# Altium PCB E16-12-VCU.PcbDoc
Units mil, origin at the board's own origin, x right, y up, seen from the top; angles counter-clockwise.
Board outline 2265 x 4510 mil, 2 copper layers (Top Layer, Bottom Layer); 54 components, 44 nets, 245 pads, 23 vias.
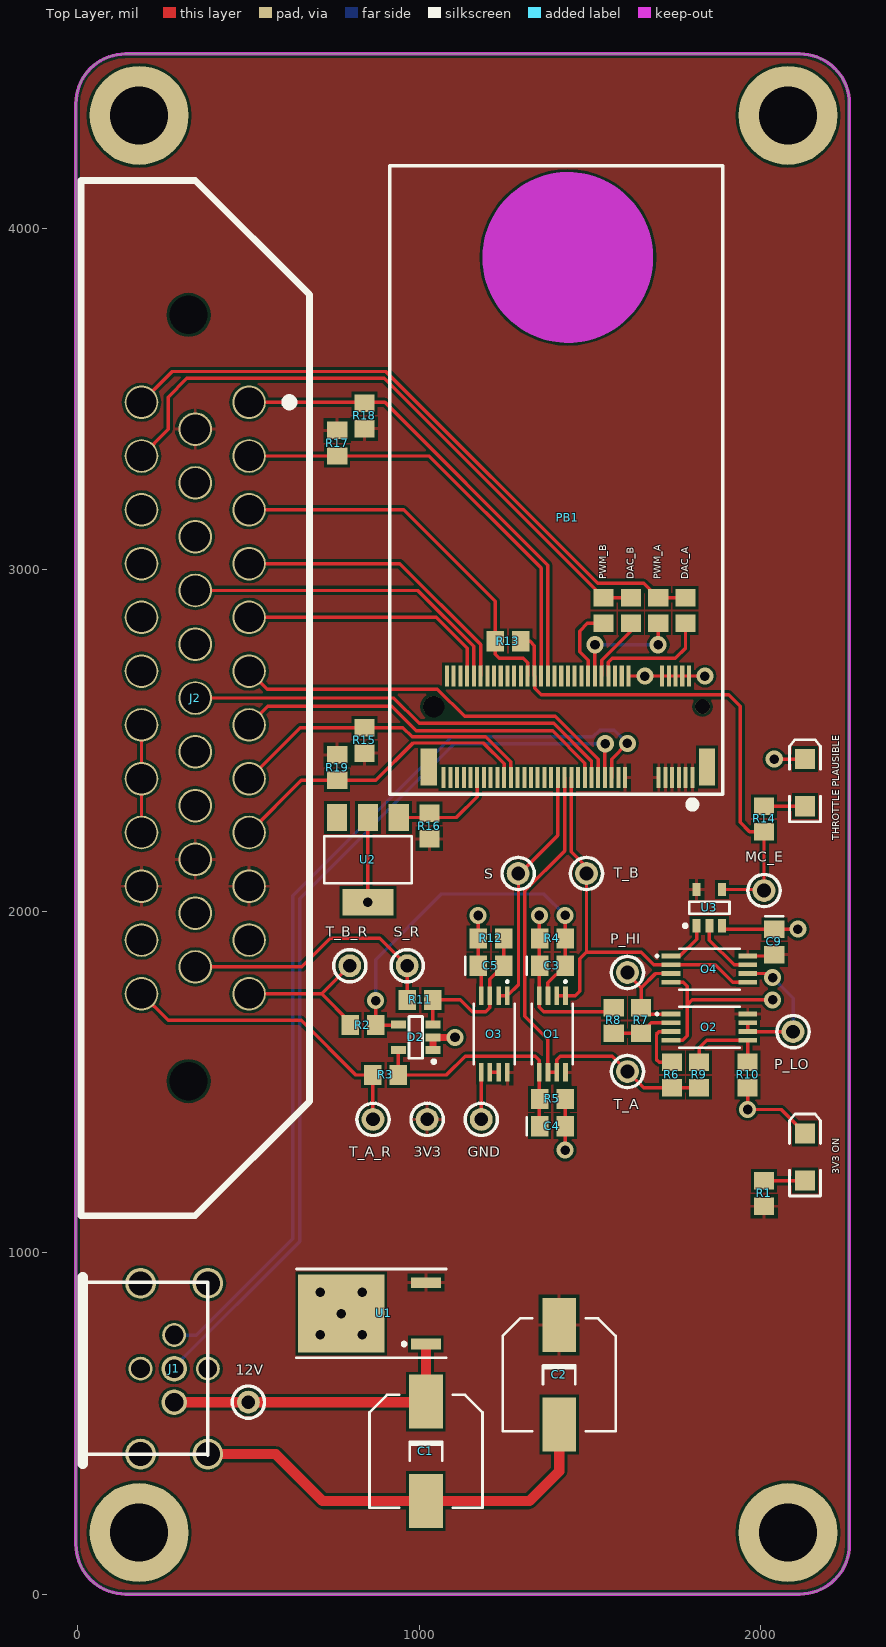
[diagram p0: Top Layer view]
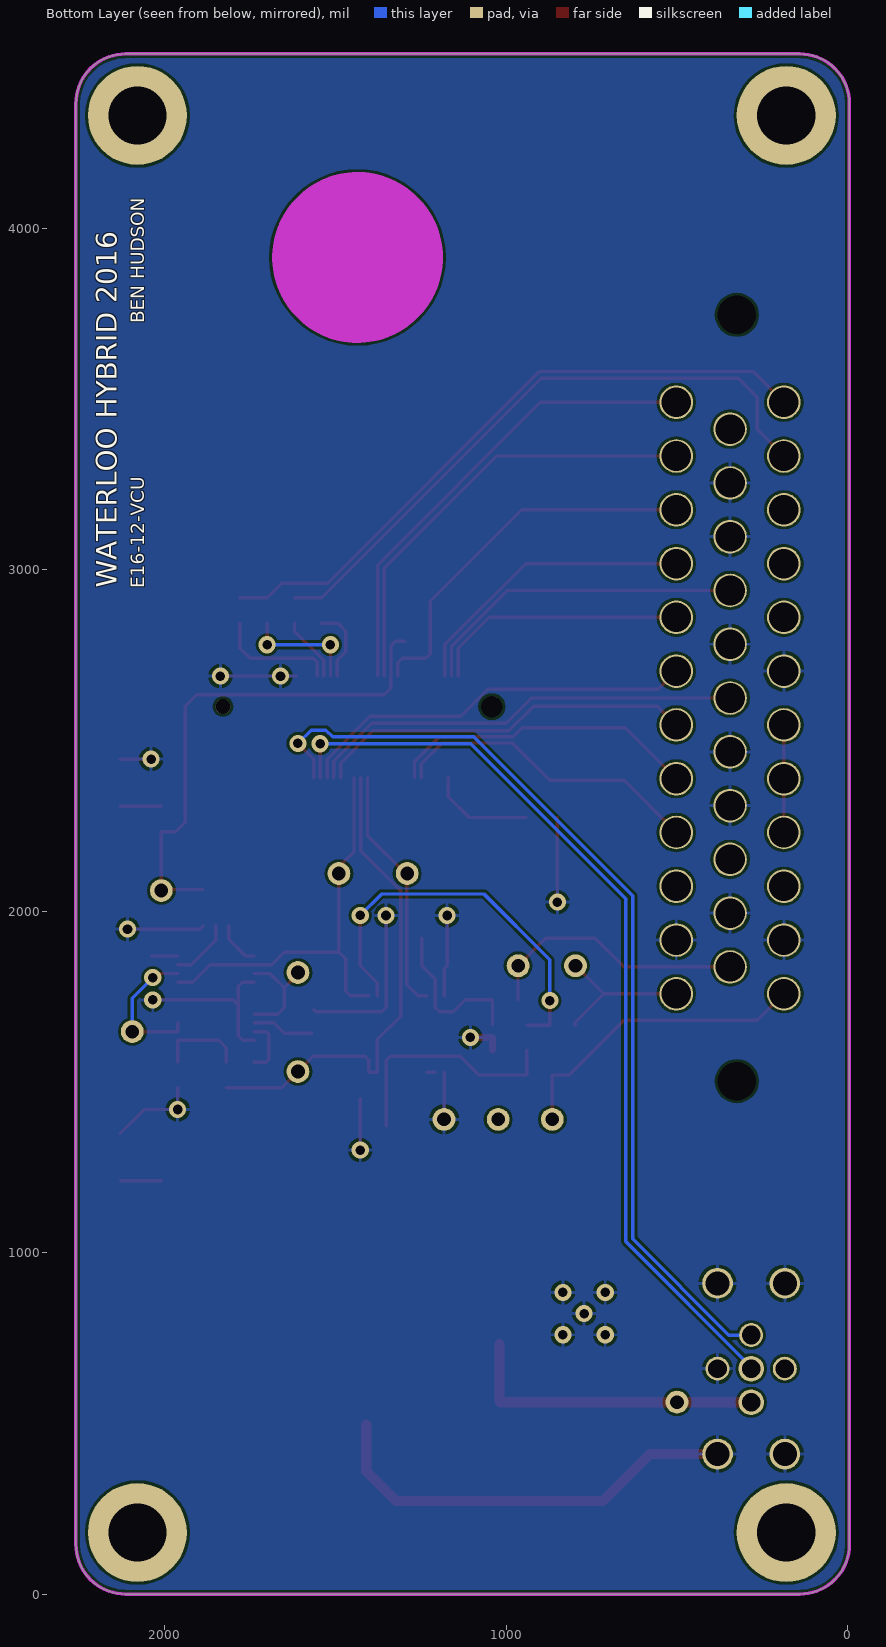
[diagram p1: Bottom Layer view, seen from below]
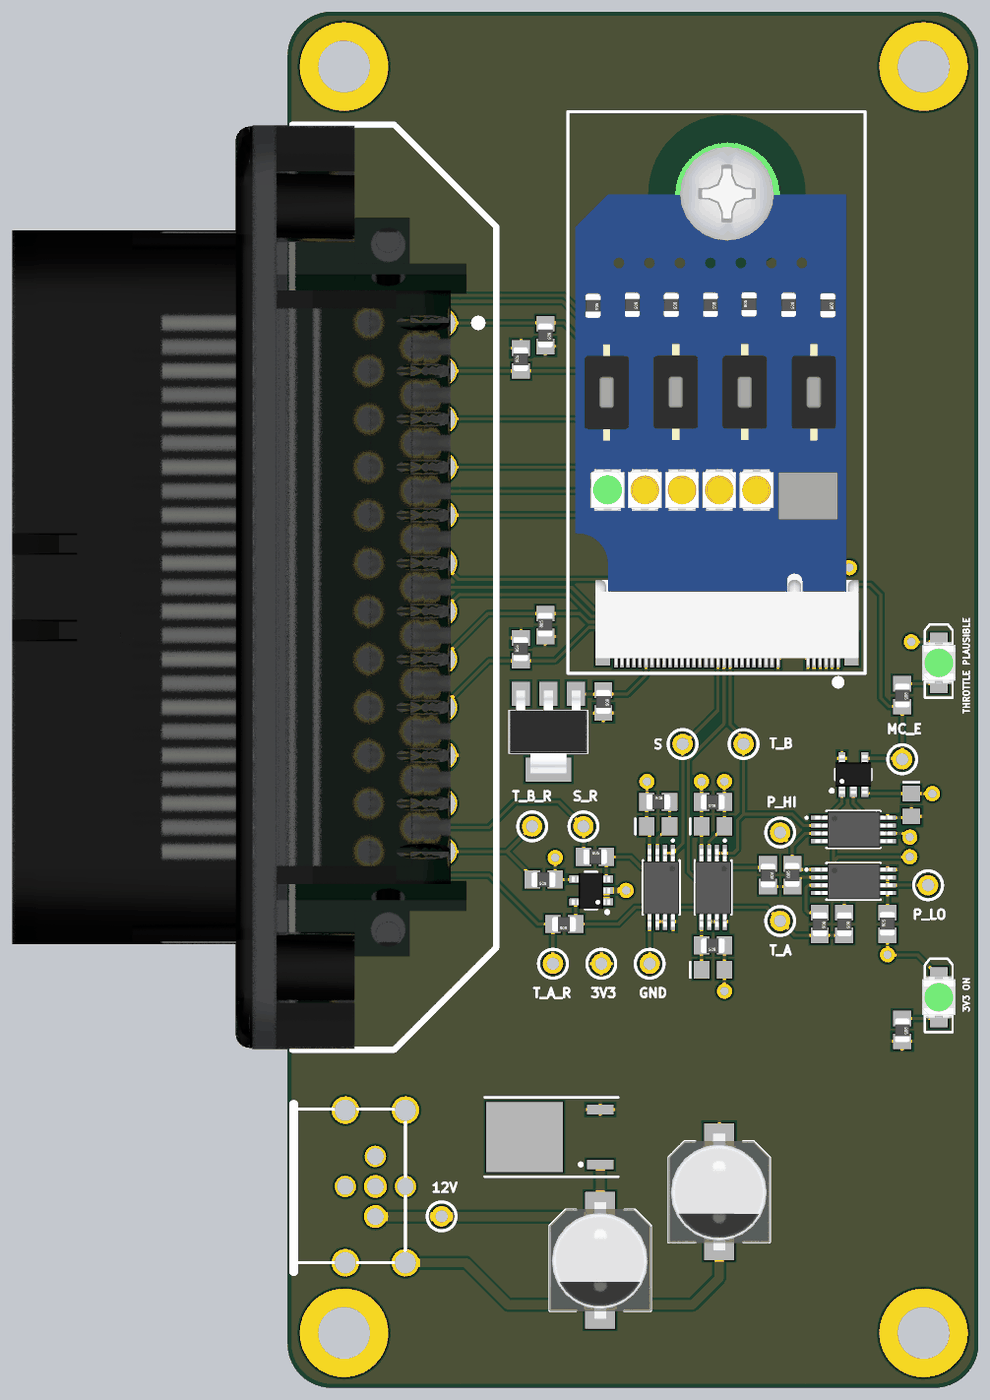
[diagram p2: 3D render of the assembled board from above, using the file's embedded part models]

## Layer stack, top to bottom
Top Solder: solder mask 0.4, Solder Resist, Dk 3.5
Top Layer: signal copper 1.4
Dielectric 1: dielectric 12.6, FR-4, Dk 4.8
Bottom Layer: signal copper 1.4
Bottom Solder: solder mask 0.4, Solder Resist, Dk 3.5

## Board outline
-5,145 -5,4365 cw(c140,4365) 140,4510 2115,4510 cw(c2115,4365) 2260,4365 2260,145 cw(c2115,145) 2115,0 140,0 cw(c140,145)

## Design rules (kind name [scope] priority, off if disabled: settings)
Clearance [All] p1: gap=7.87
DiffPairsRouting [All] p1: maxlimit=10 minlimit=10 mostfreqgap=10 toplayer_minwidth=10 toplayer_maxwidth=15 toplayer_prefwidth=15 bottomlayer_minwidth=10 bottomlayer_maxwidth=15 bottomlayer_prefwidth=15 maxuncoupledlength=500
PolygonConnect [All] p1: connectstyle=Relief reliefconductorwidth=10 reliefentries=4 polygonreliefangle="90 Angle" airgapwidth=10
RoutingVias [All] p1: holewidth=28 width=50 viastyle="Through Hole" minholewidth=28 minwidth=50 maxholewidth=28 maxwidth=50
SolderMaskExpansion [All] p1: expansion=4
Width [All] p1: maxlimit=30 minlimit=10 preferedwidth=10
29 further rules are at their usual default settings.

## Classes and differential pairs
component class E16-12-VCU-004: C9 O2 O4 R6 R7 R8 R9 R10 R14 "THROTTLE PLAUSIBLE" U3
component class E16-12-VCU-003: DAC_A DAC_B PB1 PWM_A PWM_B R13 R16 R17 R18 U2
component class E16-12-VCU-002: 3V3 "3V3 ON" 12V C1 C2 GND J1 J2 MC_E P_HI P_LO R1 R15 R19 s S_R T_A T_A_R T_B T_B_R U1
component class E16-12-VCU-001: C3 C4 C5 D2 O1 O3 R2 R3 R4 R5 R11 R12
differential pair IMU: +IMU_P -IMU_N
differential pair CAN: +CAN_P -CAN_N

## Components (designator, comment, footprint, x,y, rotation, side; value= is the part's Value field where it differs from the comment)
3V3 "Test Point" "TEST POINT 5000K" 1023.5,1390 r180 top locked (schematic designator TP2)
"3V3 ON" "OVS5MGBCR4" OVS5MGBCR4 2130,1280 r90 top locked (schematic designator D1)
12V "Test Point" "TEST POINT 5000K" 500,562 r180 top locked (schematic designator TP1)
C1 "UWT1E470MCL1GB" UWT1E470MCL1GB 1020,418 r270 top locked
C2 "UWT1E470MCL1GB" UWT1E470MCL1GB 1410,642 r270 top locked
C3 "Cap" C0805 1390,1840 r0 top
C4 "Cap" C0805 1390,1370 r0 top
C5 "Cap" C0805 1210,1840 r0 top locked
C9 "Cap" C0805 2040,1910 r270 top
D2 "RCLAMP3354S.TCT" SOT95P280X145-5N#1 990,1630 r180 top locked
DAC_A "Res" 2012[0805] 1780,2880 r270 top (schematic designator R26)
DAC_B "Res" 2012[0805] 1620,2880 r270 top (schematic designator R27)
GND "Test Point" "TEST POINT 5000K" 1182,1390 r180 top locked (schematic designator TP3)
J1 "MOLEX 84864-9003" "MOLEX 84864-9003" 282.72,660 r90 top locked
J2 "TE-1-776163-1" TE-1-776163-1 501.97,3490 r270 top locked
MC_E "Test Point" "TEST POINT 5000K" 2010,2060 r0 top (schematic designator TP13)
O1 "ADA4096-2" TSSOP8 1390,1640 r180 top locked
O2 "ADA4096-2" TSSOP8 1850,1660 r270 top locked
O3 "ADA4096-2" TSSOP8 1220,1640 r180 top locked
O4 "ADA4096-2" TSSOP8 1850,1830 r270 top locked
P_HI "Test Point" "TEST POINT 5000K" 1610,1820 r0 top locked (schematic designator TP11)
P_LO "Test Point" "TEST POINT 5000K" 2095,1647 r0 top locked (schematic designator TP12)
PB1 "ProcBoardRev2" PROC_BOARD 1800,3080 r180 top locked
PWM_A "Res" 2012[0805] 1700,2880 r90 top (schematic designator R29)
PWM_B "Res" 2012[0805] 1540,2880 r90 top (schematic designator R28)
R1 "Res" 2012[0805] 2010,1173 r270 top
R2 "Res" 2012[0805] 835,1666 r180 top locked
R3 "Res" 2012[0805] 902,1520 r180 top locked
R4 "Res" 2012[0805] 1390,1920 r180 top
R5 "Res" 2012[0805] 1390,1450 r180 top
R6 "Res" 2012[0805] 1740,1520 r270 top locked
R7 "Res" 2012[0805] 1650,1680 r90 top locked
R8 "Res" 2012[0805] 1570,1680 r270 top locked
R9 "Res" 2012[0805] 1820,1520 r270 top
R10 "Res" 2012[0805] 1962,1520 r90 top locked
R11 "Res" 2012[0805] 1003,1740 r0 top locked
R12 "Res" 2012[0805] 1210,1920 r0 top locked
R13 "Res" 2012[0805] 1260,2790 r180 top
R14 "Res" 2012[0805] 2010,2270 r270 top
R15 "Res" 2012[0805] 840,2500 r90 top
R16 "Res" 2012[0805] 1030,2249 r270 top
R17 "Res" 2012[0805] 760,3370 r90 top
R18 "Res" 2012[0805] 840,3450 r270 top
R19 "Res" 2012[0805] 760,2420 r90 top
S "Test Point" "TEST POINT 5000K" 1290,2110 r270 top locked (schematic designator TP4)
S_R "Test Point" "TEST POINT 5000K" 965,1840 r0 top locked (schematic designator TP7)
T_A "Test Point" "TEST POINT 5000K" 1610,1530 r270 top locked (schematic designator TP6)
T_A_R "Test Point" "TEST POINT 5000K" 865,1390 r0 top locked (schematic designator TP8)
T_B "Test Point" "TEST POINT 5000K" 1490,2110 r270 top locked (schematic designator TP5)
T_B_R "Test Point" "TEST POINT 5000K" 797,1840 r0 top locked (schematic designator TP9)
"THROTTLE PLAUSIBLE" "OVS5MGBCR4" OVS5MGBCR4 2130,2376 r90 top locked (schematic designator D3)
U1 "UA78M33CKVURG3" TO-252-3 646,822 r90 top locked
U2 "DS2401" SOT-223-3L 850,2150 r180 top
U3 "NC7SZ08" SOT95P280X145-5N#2 1850,2010 r90 top locked

## Footprints (in the part's own frame and the unit in brackets; to place one, negate y for a bottom-side part, rotate by r counter-clockwise, add the part's x,y. Pads: shape width x height; smd on the part's side, far side on the other; paste and mask are expansions set on the pad)
2012[0805] [mm] "Chip Resistor; Body 2.0 x 1.3 mm (LxW typ)"
  rect 1.3x1.5 smd: 1(-0.95,0) 2(0.95,0)
  body extent -0.97,-0.61 1.03,0.64, height 0.77
C0805 [mm] "Chip Capacitor; Body 2.0 x 1.2 mm (LxW typ)"
  rect 1.3x1.5 smd: 1(-0.95,0) 2(0.95,0)
  silkscreen extent -1.9,-0.65 -1.9,0.65
"MOLEX 84864-9003" [mil]
  round 70 hole 55: 1(0,98.5) 3(0,-98.5) 4(98.5,0)
  round 75 hole 55: 2(-98.5,0) 5(0,0)
  round 90 hole 70: 6(250,98.5) 7(250,-98.5) 8(-250,98.5) 9(-250,-98.5)
  silkscreen extent -278,-99 268,268, body extent -299,-148 299,452, height 710
OVS5MGBCR4 [mm] "SMT LED; 2 Flat Leads; GREEN"
  rect 1.5x1.5 smd: 1(-1.75,0) 2(1.75,0)
  silkscreen extent -2.9,-1.15 3.2,1.15, body extent -1.75,-1.4 1.75,1.4, height 1.6
PROC_BOARD [mm]
  rect 1.2x2.75 smd: 0(-1.1,16.725) 0(19.6,16.725)
  round 1.1 hole 1.1 unplated paste+0: 0(-0.75,12.225)
  round 0 hole 6.35 unplated: 0(9.258,-21.183)
  round 1.524 hole 1.6 unplated: 0(19.25,12.225)
  rect 0.3x1.55 smd: 1(0,17.5) 2(0.25,9.95) 3(0.5,17.5) 4(0.75,9.95) 5(1,17.5) 6(1.25,9.95) 7(1.5,17.5) 8(1.75,9.95) 9(2,17.5) 10(2.25,9.95) 11(2.5,17.5) 12(4.75,9.95) 13(5,17.5) 14(5.25,9.95) 15(5.5,17.5) 16(5.75,9.95) 17(6,17.5) 18(6.25,9.95) 19(6.5,17.5) 20(6.75,9.95) 21(7,17.5) 22(7.25,9.95) 23(7.5,17.5) 24(7.75,9.95) 25(8,17.5) 26(8.25,9.95) 27(8.5,17.5) 28(8.75,9.95) 29(9,17.5) 30(9.25,9.95) 31(9.5,17.5) 32(9.75,9.95) 33(10,17.5) 34(10.25,9.95) 35(10.5,17.5) 36(10.75,9.95) 37(11,17.5) 38(11.25,9.95) 39(11.5,17.5) 40(11.75,9.95) 41(12,17.5) 42(12.25,9.95) 43(12.5,17.5) 44(12.75,9.95) 45(13,17.5) 46(13.25,9.95) 47(13.5,17.5) 48(13.75,9.95) 49(14,17.5) 50(14.25,9.95) 51(14.5,17.5) 52(14.75,9.95) 53(15,17.5) 54(15.25,9.95) 55(15.5,17.5) 56(15.75,9.95) 57(16,17.5) 58(16.25,9.95) 59(16.5,17.5) 60(16.75,9.95) 61(17,17.5) 62(17.25,9.95) 63(17.5,17.5) 64(17.75,9.95) 65(18,17.5) 66(18.25,9.95) 67(18.5,17.5)
  Keep-Out Layer circle w6.35: c9.258,-21.183 r3.175
  silkscreen extent -2.25,-28 22.5,19.75, body extent -1.7,-25.44 21.89,18.08, height 6.34
SOT95P280X145-5N#1 [mm] "SOT23, 5-Leads, Body 2.95x2.80mm, Pitch 0.95mm, IPC Medium Density"
  rect 1.1x0.6 smd: 1(-1.275,0.95) 2(-1.275,0) 3(-1.275,-0.95) 4(1.275,-0.95) 5(1.275,0.95)
  silkscreen extent -1.48,-1.55 0.5,1.92, body extent -1.6,-1.48 1.6,1.52, height 0.91
SOT95P280X145-5N#2 [mm] "SOT23, 5-Leads, Body 2.90x2.80mm, Pitch 0.95mm, IPC Medium Density"
  rect 1x0.6 smd: 1(-1.35,0.95) 2(-1.35,0) 3(-1.35,-0.95) 4(1.35,-0.95) 5(1.35,0.95)
  silkscreen extent -1.47,-1.5 0.45,1.92, body extent -1.6,-1.5 1.6,1.5, height 0.92
SOT-223-3L [mm] "4-lead SOT-223"
  rect 3.8x2 smd mask+0.07: 1(0,3.15)
  rect 1.5x2 smd mask+0.07: 2(-2.3,-3.15) 3(2.3,-3.15) 4(0,-3.15)
  silkscreen extent -3.25,-1.75 3.25,1.75, body extent -3.25,-3.45 3.25,3.45, height 1.6
TE-1-776163-1 [mm] "CONN HEADER 35POS R/A GOLD BLACK"
  round 0 hole 2.85 unplated: 0(-6.5,-4.5) 0(50.5,-4.5)
  round 2.5 hole 2.2: 1(0,0) 2(4,0) 3(8,0) 4(12,0) 5(16,0) 6(20,0) 7(24,0) 8(28,0) 9(32,0) 10(36,0) 11(40,0) 12(44,0) 13(2,-4) 14(6,-4) 15(10,-4) 16(14,-4) 17(18,-4) 18(22,-4) 19(26,-4) 20(30,-4) 21(34,-4) 22(38,-4) 23(42,-4) 24(0,-8) 25(4,-8) 26(8,-8) 27(12,-8) 28(16,-8) 29(20,-8) 30(24,-8) 31(28,-8) 32(32,-8) 33(36,-8) 34(40,-8) 35(44,-8)
  silkscreen extent -16.5,-12.5 60.5,4.5, body extent -16.45,-35.8 60.45,2, height 27.77
"TEST POINT 5000K" [mm] "Test Point, 5000 Keystone Series, 0.040\" Hole"
  round 1.7 hole 1.02 mask+0.1: 1(0,0)
  silkscreen extent -1.2,-1.2 1.2,1.2
TO-252-3 [mm] "D-PAK/TO-252-3; 3 Leads"
  rect 0.8x2.2 smd: 1(-2.28,-9.5) 3(2.28,-9.5)
  rect 5.8x6.4 smd: 2(0,-3.2)
  silkscreen extent -3.3,-11 3.3,0.13
TSSOP8 [mm] "TSSOP8"
  rect 0.35x1.4 smd: 1(-0.975,-2.85) 2(-0.325,-2.85) 3(0.325,-2.85) 4(0.975,-2.85) 5(0.975,2.85) 6(0.325,2.85) 7(-0.325,2.85) 8(-0.975,2.85)
  silkscreen extent -1.52,-3.95 1.53,2.25, body extent -1.5,-3.19 1.5,3.27, height 1.17
UWT1E470MCL1GB [mm] "CAP ALUM 47UF 25V 20% SMD"
  rect 4x2.5 smd: 1(-3.7,0) 2(3.7,0)
  silkscreen extent -4.2,-4.2 4.2,4.2, body extent -4.85,-4.25 4.85,4.25, height 10.5

## Part data
3V3 12V GND MC_E P_HI P_LO S S_R T_A T_A_R T_B T_B_R: "5000-5004, 5015-5019 Keystone Electronics"
"3V3 ON" "THROTTLE PLAUSIBLE": "Typical GREEN LED"
C1 C2: "CAP ALUM 47UF 25V 20% SMD"
C3 C4 C5 C9: "Capacitor"
DAC_A DAC_B PWM_A PWM_B R1 R2 R3 R4 R5 R6 R7 R8 R9 R10 R11 R12 R13 R14 R15 R16 R17 R18 R19: "Surface Mount Resistor"
J1: "CAN Micro-Change M12, Right Angle, Male"
J2: "CONN HEADER 35POS R/A GOLD BLACK"
O1 O2 O3 O4: "2 Op-Amps, 8-TSSOP, 32V Overvoltage Protection"
PB1: "Processor board that carries the STM32F072RB"
U1: "3.3V Regulator"
U2: "IC SILICON SERIAL NUMBER SOT223"

## Free pads (board coordinates)
  round 290 hole 170: ""(180,180) ""(180,4330) ""(2080,180) ""(2080,4330)

## Via types
v1: diameter 50, hole 28, Top Layer to Bottom Layer, 23 vias

## Nets (pads, with @x,y where several pads share a name; then routed paths per layer and width w, separated by ;. In a path a pad name is that pad's centre, name@x,y a point inside that pad or via, vN(x,y) a via of type N, cw(c..) or ccw(c..) an arc to the next point about the centre after c; other vN are vias at no path point)
12V: 12V.1 C1.1 J1.2 U1.1 | length 906.8
  Top Layer w30: J1.2 1017.83,561.5 C1.1 ; C1.1 U1.1
CAN_N: J1.5 PB1.19 | length 2713.1
  Top Layer w10: PB1.19 1544.09,2489.09 v1(1545,2490)
  Bottom Layer w10: J1.5@277.64,660 650,1032.36 650,2036.72 1103.28,2490 v1(1545,2490)
CAN_P: J1.4 PB1.17 | length 2789.8
  Top Layer w10: PB1.17 1563.78,2444.78 v1(1610,2491)
  Bottom Layer w10: J1.4@277.64,758.5 347.85,758.5 630,1040.65 630,2045 1095,2510 1508.43,2510 1528.43,2530 1571,2530 v1(1610,2491)
GND: "3V3 ON.2" "THROTTLE PLAUSIBLE.2" C1.2 C2.2 C3.1 C4.2 C5.1 C9.1 D2.1 D2.2 GND.1 J1.3 J1.6 J1.7 J1.8 J1.9 J2.11 J2.14 J2.15 J2.17 J2.19 J2.20 J2.22 J2.29 J2.34 O1.4 O2.4 O3.4 O3.5 O4.4 PB1.2 PB1.4 PB1.6 PB1.8 PB1.10 PB1.12 R4.2 R5.1 R8.1 R10.1 R12.1 U1.2 U2.1 U2.4 U3.3 | length 3930.4
  Top Layer w10: v1(850,2025.98) U2.4 ; R12.1 C5.1 1181.61,1830.98 O3.4 ; R12.1@1173,1920.4 v1(1173,1987) ; O3.5 1181.61,1390.39 GND.1 ; v1(1352,1987) 1351.61,1986.61 O1.4 1351.61,1718.39 1365,1705 1557.6,1705 R8.1@1564.37,1711.77 ; v1(1427.4,1300) R5.1 ; PB1.12 PB1.10 PB1.8 PB1.6 PB1.4 PB1.2 1836.73,2688.27 v1(1837,2688) ; O2.4 1771.61,1621.61 1785,1635 1785,1725 ; O4.4 1773.39,1791.61 1785,1780 1785,1725 ; U3.3 1896.85,1947.4 C9.1 ; R10.1 v1(1962,1419) 2059.9,1419 2130,1348.9 ; v1(2035,1740) 1800,1740 1785,1725 ; v1(2040,2445) 2129.9,2445 ; C9.1@2040.4,1947 v1(2109,1947)
  Top Layer w20: D2.1 D2.2 v1(1105,1630)
  Top Layer w30: J1.9 580,410 717.67,272.33 C1.2 1322.33,272.33 1410,360 C2.2
  other v1: 710,759.26 834,759.26 771.98,821.26 710,883.26 834,883.26 1661,2688.27
HALL_FRONT_A: J2.9 PB1.49 R19.1 | length 920.7
  Top Layer w10: J2.9@502.01,2230.12 654.49,2382.6 R19.1 872.6,2382.6 982.13,2492.13 1187.87,2492.13 1248.82,2431.18 PB1.49
HALL_FRONT_B: J2.8 PB1.47 R15.2 | length 916
  Top Layer w10: J2.8 651.81,2537.4 952.6,2537.4 980,2510 1195.28,2510 1268.51,2436.77 PB1.47
HALL_U_A_RAW: J2.7 PB1.25 | length 1117.2
  Top Layer w10: J2.7 556.93,2600 920,2600 992.13,2527.87 1390.67,2527.87 1485.04,2433.5 PB1.25
HALL_U_B_RAW: J2.4 PB1.56 | length 868.5
  Top Layer w10: J2.4 943,3017.56 1179.92,2780.63 PB1.56
HALL_V_A_RAW: J2.18 PB1.23 | length 1284.8
  Top Layer w10: J2.18 926.14,2623.86 1000,2550 1393.82,2550 1504.72,2439.1 PB1.23
HALL_V_B_RAW: J2.16 PB1.58 | length 970.4
  Top Layer w10: J2.16 996.46,2938.82 1160.24,2775.04 PB1.58
HALL_W_A_RAW: J2.6 PB1.21 | length 1182.9
  Top Layer w10: J2.6 554.65,2650 1053.58,2650 1133.58,2570 1399.1,2570 1524.41,2444.69 PB1.21
HALL_W_B_RAW: J2.5 PB1.60 | length 757.3
  Top Layer w10: J2.5 1049.92,2860.08 1140.55,2769.45 PB1.60
IMU_N: J2.2 PB1.38 R17.1 | length 1307.3
  Top Layer w10: J2.2 1029.2,3332.52 1357.09,3004.63 PB1.38
IMU_P: J2.1 PB1.36 R18.1 | length 1397.2
  Top Layer w10: J2.1 900,3490 1376.77,3013.23 PB1.36
MC_ENABLE_IN: MC_E.1 PB1.40 R13.1 R14.2 U3.4 | length 1507.5
  Top Layer w10: R13.1 1325,2790 1337.4,2777.6 PB1.40 1338.31,2687.36 1338.31,2652.42 1357.5,2633.23 1906.77,2633.23 1940,2600 1940,2260 1967.4,2232.6 R14.2 MC_E.1 ; U3.4 MC_E.1@2006.85,2063.15
MC_ENABLE_OUT: J2.3 PB1.42 R13.2 | length 1131
  Top Layer w10: J2.3 954.96,3175.04 1222.6,2907.4 R13.2 1222.6,2752.4 1235,2740 1305,2740 1317.72,2727.28 PB1.42
NetC3_2: C3.2 D2.4 O1.3 R2.1 R4.1 | length 1174.1
  Top Layer w10: v1(872.4,1737.6) R2.1 D2.4@938.4,1666 ; O1.3 1377.2,1789.8 C3.2 v1(1427.4,1987.4)
  Bottom Layer w10: v1(872.4,1737.6) 872.4,1857.4 1065,2050 1364.8,2050 v1(1427.4,1987.4)
NetC4_1: C4.1 D2.5 O1.5 R3.1 R5.2 | length 704.4
  Top Layer w10: D2.5@939.4,1592.2 R3.1 1080,1520 1135,1575 1340,1575 1351.61,1563.39 O1.5 C4.1@1351.61,1370.98
NetC5_2: C5.2 D2.3 O3.3 R11.2 R12.2 | length 478.3
  Top Layer w10: D2.3 1040.2,1739.8 1120.2,1739.8 1155,1705 1195,1705 1207.2,1717.2 O3.3 1207.2,1799.8 C5.2 R12.2
NetD1_1: "3V3 ON.1" R1.1 | length 119.3
  Top Layer w10: R1.1 2129.3,1210.4
NetD3_1: "THROTTLE PLAUSIBLE.1" R14.1 | length 120
  Top Layer w10: R14.1 2130,2307.4
NetJ2_30: J2.30 J2.31 J2.32 | length 315
  Top Layer w10: J2.32 J2.31 J2.30
NetO2_1: O2.1 O4.3 P_HI.1 R7.2 | length 320.1
  Top Layer w10: P_HI.1 1610,1815 1650,1775 ; O2.1 1669.02,1698.39 R7.2 1650,1775 ; O4.3 1692.2,1817.2 1650,1775
NetO2_2: O2.2 R7.1 R8.2 | length 180.3
  Top Layer w10: R8.2 R7.1 1680.2,1672.8 O2.2
NetO2_3: O2.3 R6.1 | length 168.9
  Top Layer w10: O2.3 1702.2,1647.2 1695,1640 1695,1565 1702.6,1557.4 R6.1
NetO2_5: O2.5 R9.1 R10.2 | length 257.8
  Top Layer w10: R9.1 1820,1600 1841.61,1621.61 O2.5 ; R10.2 O2.5@1962,1621.41
NetO2_6: O2.6 O2.7 O4.6 P_LO.1 | length 418.9
  Top Layer w10: O2.7 O2.6 P_LO.1@2094.8,1647.2 ; O4.6 2022.8,1817.2 v1(2035,1805)
  Bottom Layer w10: v1(2035,1805) 2095,1745 P_LO.1
NetO3_6: O3.6 O3.7 | length 25.6
  Top Layer w10: O3.6 O3.7
NetO4_1: O4.1 U3.1 | length 134.4
  Top Layer w10: O4.1 1763.39,1868.39 1812.6,1917.6 U3.1
NetO4_7: O4.7 U3.2 | length 184
  Top Layer w10: U3.2 1850,1915 1922.2,1842.8 O4.7
NetPB1_18: DAC_A.2 PB1.18 | length 356.2
  Top Layer w10: PB1.18 1553.94,2728.66 1565.28,2740 1750,2740 1780,2770 DAC_A.2
NetPB1_20: DAC_B.2 PB1.20 | length 189.8
  Top Layer w10: PB1.20 1534.25,2734.25 1620,2820 DAC_B.2
NetPB1_22: PB1.22 PWM_A.1 | length 339.5
  Top Layer w10: PB1.22 1514.57,2779.57 v1(1515,2780) ; v1(1700,2780) PWM_A.1
  Bottom Layer w10: v1(1515,2780) v1(1700,2780)
NetPB1_24: PB1.24 PWM_B.1 | length 221.4
  Top Layer w10: PB1.24 1494.88,2735.12 1470,2760 1470,2820 1492.6,2842.6 PWM_B.1
NetPB1_57: PB1.57 R16.1 U2.2 | length 310.8
  Top Layer w10: U2.2 1109.02,2274.02 1170.08,2335.08 PB1.57
PWM_A: DAC_A.1 J2.24 PWM_A.2 | length 1904.7
  Top Layer w10: J2.24 277.09,3580 902.68,3580 1522.68,2960 1657.4,2960 PWM_A.2 DAC_A.1
PWM_B: DAC_B.1 J2.25 PWM_B.2 | length 1848.8
  Top Layer w10: J2.25 265,3410.43 265,3505 320,3560 897.4,3560 PWM_B.2 DAC_B.1
STEER_POS: O3.1 O3.2 PB1.33 S.1 | length 725.7
  Top Layer w10: O3.2 O3.1 1291,1784.82 1291,2106 1406.3,2221.3 PB1.33
STEER_POS_RAW: J2.23 R11.1 S_R.1 | length 788.5
  Top Layer w10: J2.23 656.46,1836.46 740,1920 885,1920 S_R.1 965.6,1839.4 R11.1
THROTT_POS_A: O1.6 O1.7 PB1.31 R6.2 R9.2 T_A.1 | length 1462.4
  Top Layer w10: PB1.31 1425.99,2175.99 1309,2059 1309,1692.26 1377.2,1624.06 O1.6 O1.7 1402.8,1565 1412.8,1575 1565,1575 T_A.1 1657.4,1482.6 R6.2 R9.2
THROTT_POS_A_RAW: J2.35 R3.2 T_A_R.1 | length 906.2
  Top Layer w10: J2.35@187.05,1757.76 264.8,1680 655,1680 815,1520 R3.2 864.6,1390.4 T_A_R.1
THROTT_POS_B: O1.1 O1.2 O4.2 O4.5 PB1.29 T_B.1 | length 1234
  Top Layer w10: O1.2 O1.1 1457.2,1752.2 1470,1765 1470,1860 1490,1880 ; PB1.29 1445.67,2174.33 1490,2130 T_B.1 1490,1880 ; O4.5 1918.39,1791.61 1867.2,1842.8 O4.2 1687.2,1842.8 1650,1880 1490,1880
THROTT_POS_B_RAW: J2.12 R2.2 T_B_R.1 | length 455.2
  Top Layer w10: J2.12 714.72,1757.72 ; T_B_R.1 714.72,1757.72 ; R2.2 797.6,1674.83 714.72,1757.72
VCC: 3V3.1 C2.1 C9.2 J2.10 J2.13 J2.21 J2.33 O1.8 O2.8 O3.8 O4.8 PB1.1 PB1.3 PB1.5 PB1.7 PB1.9 PB1.11 PB1.13 R1.2 R15.1 R16.2 R17.2 R18.2 R19.2 U1.3 U3.5 | length 77.8
  Top Layer w10: O4.8 C9.2@2040,1868.39
pads on no net: J1.1 J2.0 J2.26 J2.27 J2.28 PB1.0 PB1.14 PB1.15 PB1.16 PB1.26 PB1.27 PB1.28 PB1.30 PB1.32 PB1.34 PB1.35 PB1.37 PB1.39 PB1.41 PB1.43 PB1.44 PB1.45 PB1.46 PB1.48 PB1.50 PB1.51 PB1.52 PB1.53 PB1.54 PB1.55 PB1.59 PB1.61 PB1.62 PB1.63 PB1.64 PB1.65 PB1.66 PB1.67 U2.3

## Polygon pours and split planes (outlines as drawn)
VCC on Top Layer "VCC_L01_P006" (solid, pour order 6): -5,145 -5,4365 cw(c140,4365) 140,4510 2115,4510 cw(c2115,4365) 2260,4365 2260,145 cw(c2115,145) 2115,0 140,0 cw(c140,145)
GND on Bottom Layer "GND_L02_P007" (solid, pour order 7): -5,145 -5,4365 cw(c140,4365) 140,4510 2115,4510 cw(c2115,4365) 2260,4365 2260,145 cw(c2115,145) 2115,0 140,0 cw(c140,145)

## Keep-outs
Keep-Out Layer:
  lines w10: -5,145 ccw(c140,145) 140,0 2115,0 ccw(c2115,145) 2260,145 2260,4365 ccw(c2115,4365) 2115,4510 140,4510 ccw(c140,4365) -5,4365 -5,370 -5,145

## Silkscreen, mask and mechanical layers (free items; w line width, h text height)
Bottom Overlay:
  text "BEN HUDSON" at 2060,3722 h40 r270
  text "WATERLOO HYBRID 2016" at 2140,2947 h60 r270
  text "E16-12-VCU" at 2060,2945 h40 r270
Mechanical 13:
  the board outline again, w10
Mechanical 14:
  the board outline again, w10